# Altium PCB PCB_CPU_1.PcbDoc (part 1 of 2)
Units mm, origin at the board's own origin, x right, y up, seen from the top; angles counter-clockwise.
Board outline 195 x 54.5 mm, 2 copper layers (Top Layer, Bottom Layer); 53 components, 42 nets, 196 pads, 9 vias.
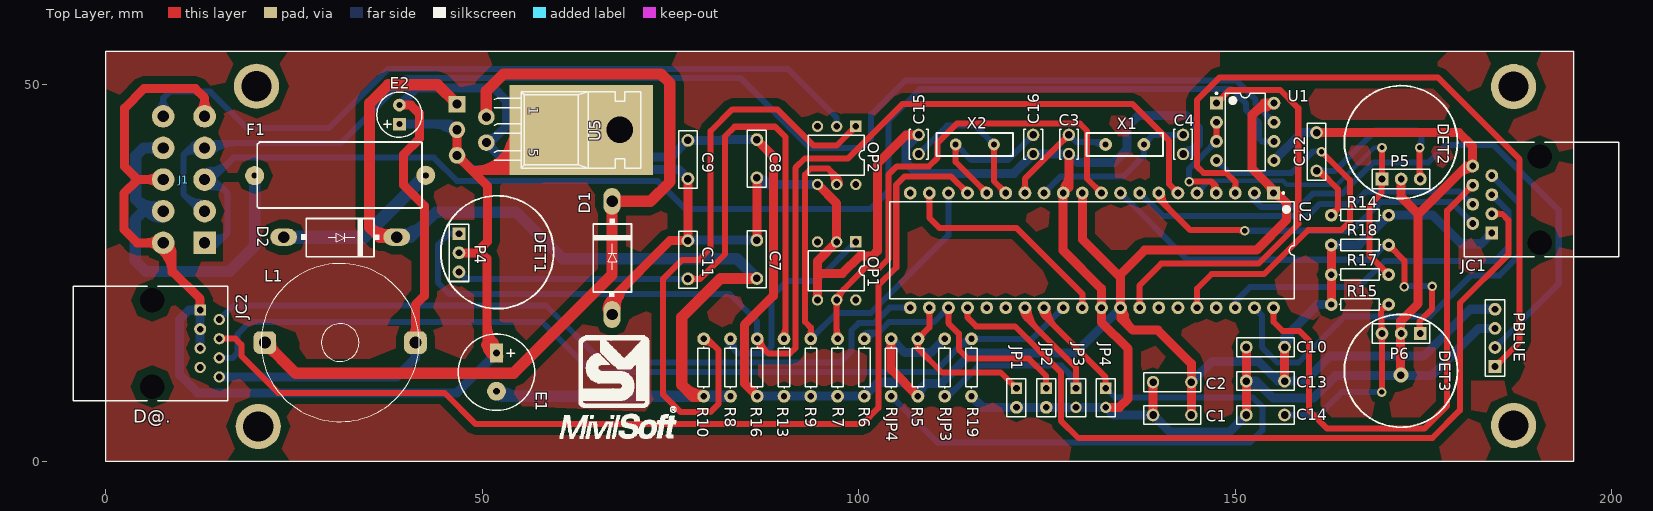
[diagram p0: Top Layer view]
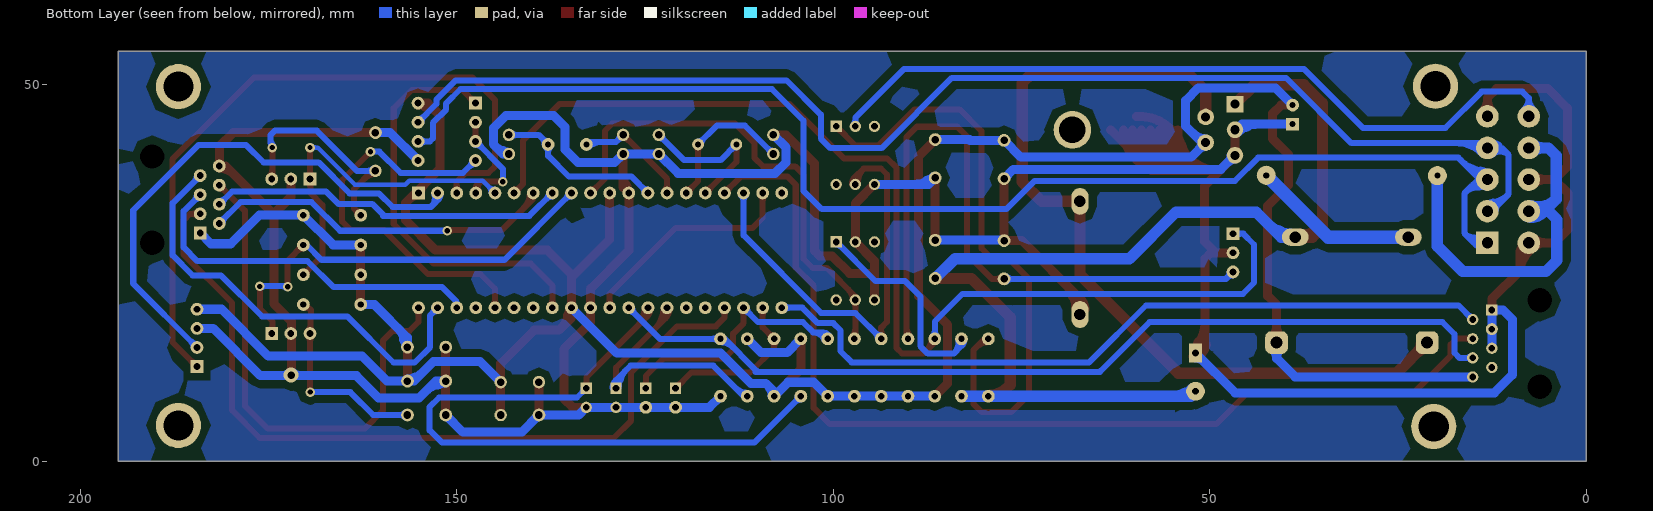
[diagram p1: Bottom Layer view, seen from below]

## Layer stack, top to bottom
Top Solder: solder mask 0.0102, Solder Resist, Dk 3.5
Top Layer: signal copper 0.0356
Dielectric 1: dielectric 0.32, FR-4, Dk 4.8
Bottom Layer: signal copper 0.0356
Bottom Solder: solder mask 0.0102, Solder Resist, Dk 3.5

## Board outline
0,0 0,54.5 195,54.5 195,0

## Design rules (kind name [scope] priority, off if disabled: settings)
Clearance "POLIGONO TOP BOTTON" [(InNamedPolygon('GND BOTTON'))] p1: gap=1
Clearance "POLIGONO TOP LAYER" [(InNamedPolygon('GND TOP'))] p2: gap=1
Clearance [All] p3: gap=0.254
PolygonConnect [All] p1: connectstyle=Relief reliefconductorwidth=0.254 reliefentries=4 polygonreliefangle="90 Angle" airgapwidth=0.254
RoomDefinition U_MDL_FUENTE_5V [InComponentClass('U_MDL_FUENTE_5V')] p1: confinementstyle=ConfineIn formatcopy=TRUE lockcomponents=FALSE outline 0.3,0 91,0 91,54.5 0.3,54.5
RoomDefinition U_MDL_RECEPTOR_IRF_2 [InComponentClass('U_MDL_RECEPTOR_IRF_2')] p2: confinementstyle=ConfineIn formatcopy=TRUE lockcomponents=FALSE outline 180,0.05 136.725,0.05 136.725,53.775 180,53.775
RoomDefinition U_MDL_RECEPTOR_IRF_1 [InComponentClass('U_MDL_RECEPTOR_IRF_1')] p3: confinementstyle=ConfineIn formatcopy=TRUE lockcomponents=FALSE outline 180,53.775 136,53.775 136,0.775 180,0.775
RoomDefinition U_MDL_RECEPTOR_IRF [InComponentClass('U_MDL_RECEPTOR_IRF')] p4: confinementstyle=ConfineIn formatcopy=TRUE lockcomponents=FALSE outline 92.225,53.775 30,53.775 30,0 92.225,0
RoomDefinition U_MDL_CONTROL [InComponentClass('U_MDL_CONTROL')] p5: confinementstyle=ConfineIn formatcopy=TRUE lockcomponents=FALSE outline 74,54.5 195,54.5 195,-0.025 74,-0.025
RoomDefinition U_MDL-485 [InComponentClass('U_MDL-485')] p6: confinementstyle=ConfineIn formatcopy=TRUE lockcomponents=FALSE outline 145,34.775 165,34.775 165,50.775 145,50.775
RoutingLayers RoutingLayers_1 [All] p1: top layer_v5=TRUE bottom layer_v5=TRUE
RoutingLayers [InNetClass('PRB[0..5]')] p2: top layer_v5=FALSE bottom layer_v5=TRUE
RoutingVias [All] p1: holewidth=0.711 width=1.27 viastyle="Through Hole" minholewidth=0.711 minwidth=1.27 maxholewidth=0.711 maxwidth=1.27
SolderMaskExpansion [All] p1: expansion=0.102
Width "Schematic Width Constraint_5" [InNet('VCC_IN')] p1: maxlimit=2 minlimit=1.2 preferedwidth=1.5
Width "Schematic Width Constraint_4" [InNet('NetD2_1')] p2: maxlimit=2 minlimit=1.2 preferedwidth=1.8
Width "Schematic Width Constraint_3" [InNet('24VCC')] p3: maxlimit=2 minlimit=1.2 preferedwidth=1.5
Width "Schematic Width Constraint_2" [InNet('NetD1_2')] p4: maxlimit=1.5 minlimit=0.8 preferedwidth=1.5
Width "Schematic Width Constraint_1" [InNet('5VCC')] p5: maxlimit=1.5 minlimit=0.8 preferedwidth=1.2
Width "Schematic Width Constraint" [InNet('GND')] p6: maxlimit=1.5 minlimit=0.8 preferedwidth=1.2
Width ALL [All] p7: maxlimit=2 minlimit=0.5 preferedwidth=0.8
28 further rules are at their usual default settings.

## Classes and differential pairs
component class U_MDL_RECEPTOR_IRF: C9 C11 P4 R13 R16
component class U_MDL_FUENTE_5V: C7 C8 D1 D2 E1 E2 F1 J1 L1 U5
component class U_MDL_CONTROL: C2 C3 C4 C15 C16 JC1 JC2 JP1 JP2 JP3 JP4 OP1 OP2 PBLUE R5 R6 R7 R8 R9 R10 R19 RJP3 RJP4 U2 X1 X2
component class U_MDL-485: C1 U1
component class U_MDL_RECEPTOR_IRF_1: C10 C12 P5 R14 R17
component class U_MDL_RECEPTOR_IRF_2: C13 C14 P6 R15 R18

## Components (designator, comment, footprint, x,y, rotation, side; value= is the part's Value field where it differs from the comment)
C1 "VP44BY224JB" VP44-2.5#1 141.647,6.15 r180 top
C2 "VP44BY224JB" VP44-2.5#2 141.647,10.519 r180 top
C3 "VP31BA220JB" VP31-2.5 127.935,42.091 r270 top
C4 "VP31BA220JB" VP31-2.5 143.099,42.091 r90 top
C7 "VP44BY224JB" VP44-2.5#3 86.481,26.831 r90 top
C8 "VP44BY224JB" VP44-2.5#3 86.481,40.192 r90 top
C9 "VP44BY224JB" VP44-2.5#3 77.328,40.09 r90 top
C10 "VP44BY224JB" VP44-2.5#3 154.033,15.167 r0 top
C11 "VP44BY224JB" VP44-2.5#3 77.328,26.775 r90 top
C12 "VP44BY224JB" VP44-2.5#1 160.828,41.126 r90 top
C13 "VP44BY224JB" VP44-2.5#3 154.033,10.659 r0 top
C14 "VP44BY224JB" VP44-2.5#3 154.033,6.15 r180 top
C15 "VP31BA220JB" VP31-2.5 107.971,42.091 r90 top
C16 "VP31BA220JB" VP31-2.5 123.185,42.091 r90 top
D1 "Diodo" 1N4000 67.25,34.525 r270 top
D2 "Diodo" 1N4000 38.65,29.775 r180 top
E1 "Cap Pol1" C1000UF 51.9,14.375 r270 top
E2 "Cap2" C1UF 39,44.775 r90 top
F1 "Fuse 1" FUSIBLE_BUSMATIC -1223.915,-1224.234 r180 top
J1 "Header 5X2" FP_CON10 10.375,37.425 r90 top
JC1 "RJ45" 15-43-6233#1 201,34.775 r90 top
JC2 "RJ45" 15-43-6233#2 -4.35,15.649 r270 top
JP1 "Header 2" HDR1X2#1 120.964,9.71 r270 top
JP2 "Header 2" HDR1X2#1 124.918,9.71 r270 top
JP3 "Header 2" HDR1X2#2 128.872,9.71 r270 top
JP4 "Header 2" HDR1X2#2 132.826,9.71 r270 top
L1 "Inductor Adj" Inductor_redondo 31.138,15.775 r0 top
OP1 "4N33" 4n35_4n33_6pines 97,25.429 r180 top
OP2 "4N33" 4n35_4n33_6pines 97,40.775 r180 top
P4 "Header 3" HDR1X3 46.92,30.235 r270 top
P5 "Header 3" HDR1X3 169.525,37.5 r0 top
P6 "Header 3" HDR1X3 174.605,16.975 r180 top
PBLUE "Header 4" HDR1X4 184.526,12.577 r90 top
R5 "Res" AXIAL-0.3#1 107.877,12.46 r270 top
R6 "Res" AXIAL-0.3#1 100.763,12.46 r270 top
R7 "Res" AXIAL-0.3#2 97.205,12.46 r270 top
R8 "Res" AXIAL-0.3#2 82.977,12.46 r90 top
R9 "Res" AXIAL-0.3#2 93.648,12.46 r270 top
R10 "Res" AXIAL-0.3#2 79.42,12.46 r90 top
R13 "Res" AXIAL-0.3#1 90.091,12.46 r90 top
R14 "Res" AXIAL-0.3#1 166.594,32.693 r180 top
R15 "Res" AXIAL-0.3#1 166.594,20.832 r0 top
R16 "Res" AXIAL-0.3#1 86.534,12.46 r270 top
R17 "Res" AXIAL-0.3#1 166.594,24.786 r180 top
R18 "Res" AXIAL-0.3#1 166.594,28.74 r180 top
R19 "Res" AXIAL-0.3#1 114.991,12.46 r270 top
RJP3 "Res" AXIAL-0.3#2 111.434,12.46 r90 top
RJP4 "Res" AXIAL-0.3#2 104.32,12.46 r90 top
U1 "DS3695N" N08E 151.354,43.768 r0 top
U2 "PIC18F4620-I/P" PDIP600-P40 130.983,28.02 r270 top
U5 "LM2596T-5.0" FP_LM2596_D_PCB 68.25,44.025 r270 top
X1 "20Mhz" XTAL-1#1 132.812,42.091 r0 top
X2 "20Mhz" XTAL-1#2 117.978,42.091 r180 top

## Footprints (in the part's own frame and the unit in brackets; to place one, negate y for a bottom-side part, rotate by r counter-clockwise, add the part's x,y. Pads: shape width x height; smd on the part's side, far side on the other; paste and mask are expansions set on the pad)
1N4000 [mil] "Diodo Rectificador de proposito general"
  oval 140x90 hole 60: 1(591.54,0) 2(0,0)
  silkscreen extent 90,-98 500,102, body extent -27,-102 615,106, height 183
4n35_4n33_6pines [mm] "optoacoplador"
  rect 1.5x1.5 hole 0.9: 1(-2.628,-3.717)
  round 1.5 hole 0.9: 2(-0.088,-3.717) 3(2.452,-3.717) 6(-2.628,3.988) 7(-0.088,3.988) 8(2.452,3.988)
  silkscreen extent -3.72,-2.55 3.7,2.75
15-43-6233#1 [mm] "Connector; PCB Jack, Thru-Hole; 1-Port; Unshielded without Lightpipes; Right Angle"
  rect 1.7x1.7 hole 0.9 paste+0: 1(-4.445,16.89)
  round 1.7 hole 0.9 paste+0: 2(-3.175,19.43) 3(-1.905,16.89) 4(-0.635,19.43) 5(0.635,16.89) 6(1.905,19.43) 7(3.175,16.89) 8(4.445,19.43)
  round 2.95 hole 3.25 unplated: MH1(-5.715,10.54) MH2(5.715,10.54)
  silkscreen extent -7.62,0 7.62,20.58
15-43-6233#2 [mm] "Connector; PCB Jack, Thru-Hole; 1-Port; Unshielded without Lightpipes; Right Angle"
  rect 1.5x1.5 hole 0.9: 1(-4.445,16.89)
  round 1.5 hole 0.9: 2(-3.175,19.43) 4(-0.635,19.43) 5(0.635,16.89) 6(1.905,19.43) 7(3.175,16.89) 8(4.445,19.43)
  round 1.6 hole 0.9: 3(-1.905,16.89)
  round 2.95 hole 3.25 unplated: MH1(-5.715,10.54) MH2(5.715,10.54)
  silkscreen extent -7.62,0 7.62,20.58
AXIAL-0.3#1 [mm] "Axial Device, Thru-Hole; 2 Leads; 0.3 in Pin Spacing"
  round 1.7 hole 0.85 paste+0: 1(-3.81,0) 2(3.81,0)
  silkscreen extent -2.77,-0.76 2.77,0.76
AXIAL-0.3#2 [mm] "Axial Device, Thru-Hole; 2 Leads; 0.3 in Pin Spacing"
  round 1.7 hole 0.85: 1(-3.81,0) 2(3.81,0)
  silkscreen extent -2.77,-0.76 2.77,0.76
C1UF [mm]
  rect 1.7x1.7 hole 0.8 paste+0: 1(0,0)
  round 1.7 hole 0.8 paste+0: 2(2.54,0)
  silkscreen extent -1.73,-3 4.27,3
C1000UF [mm]
  rect 2.5x1.7 hole 0.9: 1(0,0)
  round 2.5 hole 0.9 paste+0: 2(5.08,0)
  silkscreen extent -2.54,-5.08 7.62,5.08
FP_CON10 [mm]
  rect 3x3 hole 1.5: 1(-8.4,-2.75)
  round 3 hole 1.5: 2(-8.4,2.75) 3(-4.2,-2.75) 4(-4.2,2.75) 5(0,-2.75) 6(0,2.75) 7(4.2,-2.75) 8(4.2,2.75) 9(8.4,-2.75) 10(8.4,2.75)
FP_LM2596_D_PCB [mm] "Fotprint LM2596 disipa calor en el PCB"
  round 5 hole 3.5: 0(0,0)
  rect 12x19 smd: 0(0.008,-5.089)
  rect 2.2x2.2 hole 1.2: 1(-3.416,-21.597)
  round 2.2 hole 1.2: 2(-1.716,-17.697) 3(-0.016,-21.597) 4(1.684,-17.697) 5(3.384,-21.597)
  silkscreen extent -5.08,-16.62 5.08,2.79
FUSIBLE_BUSMATIC [mil]
  round 100 hole 31.5: 1(-49859,-49694) 2(-48964,-49692)
  silkscreen extent -49840,-49868 -48978,-49523
HDR1X2#1 [mm] "Connector; Header; 2 Position"
  rect 1.5x1.5 hole 0.9: 1(0,0)
  round 1.7 hole 0.9 paste+0: 2(2.54,0)
  silkscreen extent -1.27,-1.27 3.81,1.27
HDR1X2#2 [mm] "Connector; Header; 2 Position"
  rect 1.5x1.5 hole 0.9: 1(0,0)
  round 1.5 hole 0.9: 2(2.54,0)
  silkscreen extent -1.27,-1.27 3.81,1.27
HDR1X3 [mm] "Connector; Header; 3 Position"
  rect 1.7x1.7 hole 0.9 paste+0: 1(0,0)
  round 1.7 hole 0.9 paste+0: 2(2.54,0) 3(5.08,0)
  silkscreen extent -1.27,-1.27 6.35,1.27
HDR1X4 [mm] "Connector; Header; 4 Position"
  rect 1.7x1.7 hole 0.9 paste+0: 1(0,0)
  round 1.7 hole 0.9 paste+0: 2(2.54,0) 3(5.08,0) 4(7.62,0)
  silkscreen extent -1.27,-1.27 8.89,1.27
Inductor_redondo [mm]
  rrect50% 3x3 hole 1.6: 1(10,0) 2(-10,0)
  silkscreen extent -10.5,-10.5 10.5,10.5
N08E [mm] "DIP, 8-Leads, Row Spacing 7.62mm, Pitch 2.54mm, Body 9.91x6.35mm"
  rect 1.7x1.7 hole 0.9 paste+0: 1(-3.81,3.81)
  round 1.7 hole 0.9 paste+0: 2(-3.81,1.27) 3(-3.81,-1.27) 4(-3.81,-3.81) 5(3.81,-3.81) 6(3.81,-1.27) 7(3.81,1.27) 8(3.81,3.81)
  silkscreen extent -3.93,-5.15 2.65,5.23, body extent -3.6,-5.15 3.6,5.15, height 5.34
PDIP600-P40 [mm] "DIP, 40-Leads, Row Spacing 15.24mm, Pitch 2.54mm, Body 51.8x13.5mm"
  rect 1.7x1.7 hole 0.9 paste+0: 1(-7.62,24.13)
  round 1.7 hole 0.9 paste+0: 2(-7.62,21.59) 3(-7.62,19.05) 4(-7.62,16.51) 5(-7.62,13.97) 6(-7.62,11.43) 7(-7.62,8.89) 8(-7.62,6.35) 9(-7.62,3.81) 10(-7.62,1.27) 11(-7.62,-1.27) 12(-7.62,-3.81) 13(-7.62,-6.35) 14(-7.62,-8.89) 15(-7.62,-11.43) 16(-7.62,-13.97) 17(-7.62,-16.51) 18(-7.62,-19.05) 19(-7.62,-21.59) 20(-7.62,-24.13) 21(7.62,-24.13) 22(7.62,-21.59) 23(7.62,-19.05) 24(7.62,-16.51) 25(7.62,-13.97) 26(7.62,-11.43) 27(7.62,-8.89) 28(7.62,-6.35) 29(7.62,-3.81) 30(7.62,-1.27) 31(7.62,1.27) 32(7.62,3.81) 33(7.62,6.35) 34(7.62,8.89) 35(7.62,11.43) 36(7.62,13.97) 37(7.62,16.51) 38(7.62,19.05) 39(7.62,21.59) 40(7.62,24.13)
  silkscreen extent -7.74,-26.85 6.45,26.85, body extent -7.3,-26.85 7.3,26.85, height 6.35
VP31-2.5 [mm] "Capacitor, Ceramic, Thru-Hole, Dipped Radial; Body 4 x 2.5 mm (WxT) Pin Spacing 2.54 mm (typ)"
  round 1.65 hole 1: 1(-1.27,0) 2(1.27,0)
  silkscreen extent -2,-1.25 2,1.25
VP44-2.5#1 [mm] "Capacitor, Ceramic, Thru-Hole, Dipped Radial; Body 7.6 x 2.5 mm (WxT) Pin Spacing 5.08 mm (typ)"
  round 1.65 hole 1: 1(-2.54,0)
  round 1.7 hole 1 paste+0: 2(2.54,0)
  silkscreen extent -3.8,-1.25 3.8,1.25
VP44-2.5#2 [mm] "Capacitor, Ceramic, Thru-Hole, Dipped Radial; Body 7.6 x 2.5 mm (WxT) Pin Spacing 5.08 mm (typ)"
  round 1.65 hole 1: 1(-2.54,0) 2(2.54,0)
  silkscreen extent -3.8,-1.25 3.8,1.25
VP44-2.5#3 [mm] "Capacitor, Ceramic, Thru-Hole, Dipped Radial; Body 7.6 x 2.5 mm (WxT) Pin Spacing 5.08 mm (typ)"
  round 1.7 hole 1 paste+0: 1(-2.54,0) 2(2.54,0)
  silkscreen extent -3.8,-1.25 3.8,1.25
XTAL-1#1 [mm]
  round 1.7 hole 0.8 paste+0: 1(0,0) 2(5.08,0)
  silkscreen extent -2.54,-1.52 7.62,1.52
XTAL-1#2 [mm]
  round 1.575 hole 0.8: 1(0,0) 2(5.08,0)
  silkscreen extent -2.54,-1.52 7.62,1.52

## Part data
C1 C2 C7 C8 C9 C10 C11 C12 C13 C14: "Dipped Radial Multilayer Ceramic Capacitor X7R: 220nF, 100V"
C3 C4 C15 C16: "Dipped Radial Multilayer Ceramic Capacitor COG (NPO): 22pF, 100V"
D1 D2: "Diodo rectificador"
E1: "Polarized Capacitor (Radial)"
E2: "Capacitor"
F1: "Fuse"
J1: "Header, 5-Pin, Dual row"
JC1 JC2: library part 15-43-6233, "Right Angle, Standard Profile, RJ45-Keyed, Flange Mount PCB Jack"
JP1 JP2 JP3 JP4: "Header, 2-Pin"
L1: "Adjustable Inductor"
OP1 OP2: library part ILD74, "Optocoupler, Phototransistor Output, Dual Channel, TTL Compatible, Pb-free"
P4 P5 P6: "Header, 3-Pin"
PBLUE: "Header, 4-Pin"
R5 R6 R7 R8 R9 R10 R13 R14 R15 R16 R17 R18 R19 RJP3 RJP4: library part Res1, "Resistor"
U1: "Multipoint RS485/RS422 Transceiver/Repeater"
U2: "Enhanced Flash Microcontroller with 10-Bit A/D and nanoWatt Technology, 64K Flash, 40-Pin PDIP, Industrial Temperature Range"
U5: "SIMPLE SWITCHER Power Converter 150 KHz 3A Step-Down Voltage Regulator"
X1 X2: library part "Cristal de cuarzo", "Cristal de cuarzo"

## Free pads (board coordinates)
  round 6 hole 4: 0(20.032,49.821) 0(20.26,4.626) 0(187,4.775) 0(187,49.775)

## Via types
v1: diameter 1.27, hole 0.711, Top Layer to Bottom Layer, 8 vias
v2: diameter 2, hole 1, Top Layer to Bottom Layer, 1 vias

## Nets (pads, with @x,y where several pads share a name; then routed paths per layer and width w, separated by ;. In a path a pad name is that pad's centre, name@x,y a point inside that pad or via, vN(x,y) a via of type N, cw(c..) or ccw(c..) an arc to the next point about the centre after c; other vN are vias at no path point)
5VCC: C1.1 C2.1 C8.2 C9.2 C10.2 C13.2 E2.2 JC1.1 JC2.8 L1.1 PBLUE.4 R5.2 R6.2 R7.2 R9.2 R13.1 R14.1 R15.1 R16.2 R17.2 R18.2 RJP3.2 RJP4.2 U1.8 U2.1 U2.11 U2.32 U5.4 | length 507.7
  Top Layer w1.2: E2.2@39,47.315 40.535,47.315 41.675,46.175 41.675,42.869 39.575,40.769 39.575,36.68 42.325,33.93 42.325,21.979 41.138,20.792 L1.1@41.138,15.775 ; C8.2@86.481,42.732 88.675,40.538 88.675,21.974 84.826,18.125 84.826,10.358 R16.2@86.534,8.65 ; RJP4.2@104.32,16.27 104.32,12.207 R5.2@107.877,8.65 ; U2.11@129.713,35.64 129.713,29.487 134.793,24.407 U2.32@134.793,20.4 ; U2.32@134.787,20.4 U2.32@134.793,20.4 ; U2.32@134.85,19.775 134.85,19 136.425,17.425 139.75,17.425 144.187,12.988 C2.1@144.187,10.519 C1.1@144.187,6.15 ; U1.8@155.164,47.578 153.853,47.578 152.25,45.975 152.25,38.9 156.86,34.29 156.86,32.06 152.85,28.05 138,28.05 134.793,24.843 U2.32@134.793,20.4 ; C13.2@156.573,10.659 C10.2@156.573,15.167 ; R15.1@162.784,20.832 R17.2@162.784,24.786 R18.2@162.784,28.739 ; L1.1@40.501,16.411 ccw(c38.965,17.948) 41.138,17.948 ; L1.1@40.501,16.411 ccw(c38.965,17.948) 41.138,17.948 ; L1.1@40.501,16.411 ccw(c38.965,17.948) 41.138,17.948 ; 41.138,17.948 ccw(c43.31,17.948) L1.1@41.774,16.411 ; 41.138,17.948 ccw(c43.31,17.948) L1.1@41.774,16.411 ; 41.138,17.948 ccw(c43.31,17.948) L1.1@41.774,16.411 ; U2.32@134.668,20.183 cw(c133.954,18.947) 135.334,19.316 ; U2.32@134.668,20.183 cw(c133.954,18.947) 135.334,19.316 ; U2.32@134.668,20.183 cw(c133.954,18.947) 135.334,19.316 ; U2.32@135.043,20.4 ccw(c138.889,20.4) 136.17,17.68 ; U2.32@135.043,20.4 ccw(c138.889,20.4) 136.17,17.68 ; U2.32@135.043,20.4 ccw(c138.889,20.4) 136.17,17.68 ; 152.499,46.224 cw(c155.164,43.559) U1.8@155.164,47.328 ; 152.499,46.224 cw(c155.164,43.559) U1.8@155.164,47.328 ; 152.499,46.224 cw(c155.164,43.559) U1.8@155.164,47.328 ; 154.08,47.037 ccw(c153.711,48.417) U1.8@154.947,47.703 ; 154.08,47.037 ccw(c153.711,48.417) U1.8@154.947,47.703 ; 154.08,47.037 ccw(c153.711,48.417) U1.8@154.947,47.703 ; 154.406,36.744 cw(c153.301,35.64) U2.1@154.863,35.64 ; 154.406,36.744 cw(c153.301,35.64) U2.1@154.863,35.64 ; 154.406,36.744 cw(c153.301,35.64) U2.1@154.863,35.64 ; U2.1@155.113,35.39 cw(c155.113,33.828) 156.218,34.932 ; U2.1@155.113,35.39 cw(c155.113,33.828) 156.218,34.932 ; U2.1@155.113,35.39 cw(c155.113,33.828) 156.218,34.932
  Bottom Layer w1.2: JC2.8@15.08,11.204 38.679,11.204 41.138,13.663 ; E2.2@39,47.315 41.285,49.6 51.52,49.6 53.2,47.92 53.2,44.525 51.016,42.341 U5.4@50.553,42.341 52.494,40.4 75.097,40.4 C9.2@77.328,42.63 81.828,42.63 81.93,42.732 C8.2@86.481,42.732 ; L1.1@41.138,15.775 41.138,13.663 ; R16.2@86.534,8.65 R13.1@90.091,8.65 R9.2@93.648,8.65 R7.2@97.205,8.65 R6.2@100.763,8.65 102.613,10.5 106.027,10.5 R5.2@107.877,8.65 107.877,9.227 109.004,10.354 110.954,10.354 114.975,14.375 128.768,14.375 U2.32@134.793,20.4 ; RJP4.2@104.32,16.27 106.147,14.442 109.606,14.442 RJP3.2@111.434,16.27 ; C2.1@144.187,10.519 146.918,13.25 153.125,13.25 155.716,10.659 C13.2@156.573,10.659 159.284,10.659 162.6,13.975 175.05,13.975 181.272,20.197 PBLUE.4@184.526,20.197 ; C10.2@156.573,15.167 156.573,16.423 160.982,20.832 R15.1@162.784,20.832 ; R18.2@162.784,28.739 166.45,28.739 R14.1@170.404,32.693 176.257,32.693 180.05,28.9 182.68,28.9 JC1.1@184.11,30.33 ; L1.1@40.514,15.126 cw(c39.109,13.663) 41.138,13.663 ; L1.1@40.514,15.126 cw(c39.109,13.663) 41.138,13.663 ; L1.1@40.514,15.126 cw(c39.109,13.663) 41.138,13.663 ; 41.138,13.663 cw(c43.166,13.663) L1.1@41.761,15.126 ; 41.138,13.663 cw(c43.166,13.663) L1.1@41.761,15.126 ; 41.138,13.663 cw(c43.166,13.663) L1.1@41.761,15.126 ; U5.4@50.553,41.841 cw(c50.553,40.634) 51.407,41.487 ; U5.4@50.553,41.841 cw(c50.553,40.634) 51.407,41.487 ; U5.4@50.553,41.841 cw(c50.553,40.634) 51.407,41.487 ; U5.4@50.553,42.841 ccw(c50.553,45.166) 52.197,43.522 ; U5.4@50.553,42.841 ccw(c50.553,45.166) 52.197,43.522 ; U5.4@50.553,42.841 ccw(c50.553,45.166) 52.197,43.522 ; U5.4@51.053,42.341 ccw(c52.26,42.341) 51.407,41.487 ; U5.4@51.053,42.341 ccw(c52.26,42.341) 51.407,41.487 ; U5.4@51.053,42.341 ccw(c52.26,42.341) 51.407,41.487 ; R5.2@107.752,8.866 ccw(c107.038,10.103) 108.417,9.734 ; R5.2@107.752,8.866 ccw(c107.038,10.103) 108.417,9.734 ; R5.2@107.752,8.866 ccw(c107.038,10.103) 108.417,9.734 ; R5.2@108.127,8.65 cw(c110.123,8.65) 108.711,10.061 ; R5.2@108.127,8.65 cw(c110.123,8.65) 108.711,10.061 ; R5.2@108.127,8.65 cw(c110.123,8.65) 108.711,10.061 ; 154.683,11.692 ccw(c156.573,13.582) C13.2@156.573,10.909 ; 154.683,11.692 ccw(c156.573,13.582) C13.2@156.573,10.909 ; 154.683,11.692 ccw(c156.573,13.582) C13.2@156.573,10.909 ; 155.49,11.199 cw(c155.12,9.82) C13.2@156.357,10.534 ; 155.49,11.199 cw(c155.12,9.82) C13.2@156.357,10.534 ; 155.49,11.199 cw(c155.12,9.82) C13.2@156.357,10.534 ; C10.2@156.448,15.384 ccw(c155.734,16.621) 157.114,16.251 ; C10.2@156.448,15.384 ccw(c155.734,16.621) 157.114,16.251 ; C10.2@156.448,15.384 ccw(c155.734,16.621) 157.114,16.251 ; C10.2@156.823,15.167 cw(c160.459,15.167) 157.888,17.738 ; C10.2@156.823,15.167 cw(c160.459,15.167) 157.888,17.738 ; C10.2@156.823,15.167 cw(c160.459,15.167) 157.888,17.738
24VCC: C7.1 D2.2 E1.2 R8.1 R10.1 U5.1 | length 194.6
  Top Layer w1.5: D2.2@38.65,29.775 36.35,29.775 35.025,31.1 35.025,47.55 37.477,50.002 44.092,50.002 U5.1@46.653,47.441 ; R10.1@79.42,8.65 78.025,8.65 76.525,10.15 76.525,19.15 81.666,24.291 C7.1@86.481,24.291 ; 35.025,31.1 ccw(c37.398,33.473) D2.2@37.95,30.163 ; 35.025,31.1 ccw(c37.398,33.473) D2.2@37.95,30.163 ; 35.025,31.1 ccw(c37.398,33.473) D2.2@37.95,30.163 ; 36.195,30.333 cw(c35.979,28.098) D2.2@37.712,29.525 ; 36.195,30.333 cw(c35.979,28.098) D2.2@37.712,29.525 ; 36.195,30.333 cw(c35.979,28.098) D2.2@37.712,29.525 ; 76.868,9.807 ccw(c79.42,12.359) R10.1@79.42,8.75 ; 76.868,9.807 ccw(c79.42,12.359) R10.1@79.42,8.75 ; 76.868,9.807 ccw(c79.42,12.359) R10.1@79.42,8.75
  Bottom Layer w1.5: D2.2@38.65,29.775 40.525,29.775 43.85,33.1 54.5,33.1 60.687,26.913 83.859,26.913 C7.1@86.481,24.291 ; D2.2@39.406,30.149 ccw(c39.721,31.126) 40.447,30.4 ; E1.2@51.9,9.295 52.545,8.65 R10.1@79.42,8.65 R8.1@82.977,8.65 ; D2.2@39.285,30.168 ccw(c39.285,34.11) 42.073,31.323 ; D2.2@39.285,30.168 ccw(c39.285,34.11) 42.073,31.323 ; D2.2@39.285,30.168 ccw(c39.285,34.11) 42.073,31.323 ; D2.2@39.625,29.579 cw(c41.569,28.456) 40.988,30.624 ; D2.2@39.625,29.579 cw(c41.569,28.456) 40.988,30.624 ; D2.2@39.625,29.579 cw(c41.569,28.456) 40.988,30.624 ; E1.2@52.17,8.874 cw(c52.881,7.763) 53.541,8.906 ; E1.2@52.17,8.874 cw(c52.881,7.763) 53.541,8.906 ; E1.2@52.17,8.874 cw(c52.881,7.763) 53.541,8.906 ; E1.2@52.254,9.649 ccw(c54.665,12.06) 54.665,8.65 ; E1.2@52.254,9.649 ccw(c54.665,12.06) 54.665,8.65 ; E1.2@52.254,9.649 ccw(c54.665,12.06) 54.665,8.65
485_DO_A: J1.1 J1.5 U1.6 | length 230.2
  Bottom Layer w0.8: J1.5@12.675,37.642 cw(c14.584,36.721) 14.035,38.769 ; J1.5@12.769,37.074 ccw(c14.493,38.773) 14.475,36.353 ; J1.1@13.125,29.025 14.925,29.025 ; J1.5@13.395,37.295 cw(c16.659,35.72) 15.721,39.221 ; J1.5@13.675,38.378 ccw(c14.508,39.821) 14.939,38.211 ; U1.6@155.164,42.498 153.577,42.498 153.2,42.875 153.2,44.95 151.43,46.72 151.43,47.545 149.525,49.45 108.166,49.45 103.984,45.267 103.984,35.937 101.539,33.492 77.028,33.492 73.27,37.25 46.65,37.25 43.575,40.325 17,40.325 14.1,37.425 J1.5@13.125,37.425 14.375,37.425 16.2,35.6 ; 14.925,29.025 cw(c14.925,29.948) 14.104,29.527 ccw(c14.925,29.948) 14.925,29.025 ; 14.925,29.025 ccw(c14.925,28.102) 14.104,28.523 cw(c14.925,28.102) 14.925,29.025 ; 14.925,29.025 16.2,30.3 ; 16.2,30.3 cw(c14.729,31.771) 13.68,29.975 ccw(c14.729,31.771) 16.2,30.3 ; 16.2,30.3 16.2,35.6 ; 16.2,35.6 ccw(c14.137,33.537) 13.402,36.36 cw(c14.137,33.537) 16.2,35.6 ; 154.078,42.498 cw(c154.078,41.411) U1.6@154.846,42.18 ; 154.078,42.498 ccw(c154.078,43.584) U1.6@154.846,42.816 ; 154.078,42.498 cw(c154.078,41.411) U1.6@154.846,42.18 ; 154.078,42.498 ccw(c154.078,43.584) U1.6@154.846,42.816 ; 154.078,42.498 cw(c154.078,41.411) U1.6@154.846,42.18 ; 154.078,42.498 ccw(c154.078,43.584) U1.6@154.846,42.816 ; J1.1@12.873,28.593 ccw(c13.647,29.919) 14.733,28.833 cw(c13.647,29.919) J1.1@12.873,28.593 ; J1.5@13.125,37.725 ccw(c13.125,40.803) 15.302,38.627 cw(c13.125,40.803) J1.5@13.125,37.725 ; J1.5@13.125,38.525 ccw(c13.125,43.535) 16.667,39.992 cw(c13.125,43.535) J1.5@13.125,38.525 ; J1.5@13.201,37.135 cw(c13.729,35.105) 15.212,36.588 ccw(c13.729,35.105) J1.5@13.201,37.135 ; J1.1@13.276,29.284 ccw(c14.188,30.845) 15.467,29.567 cw(c14.188,30.845) J1.1@13.276,29.284
485_DO_B: J1.3 J1.7 U1.7 | length 219.3
  Bottom Layer w0.5: U1.7@155.164,45.038 U1.7@155.164,45.211
  Bottom Layer w0.8: 10.852,34.934 cw(c10.092,32.099) J1.3@12.844,33.121 ; 12.348,34.533 cw(c11.873,32.76) J1.3@13.594,33.399 ; J1.3@13.125,33.225 12.575,33.225 10.3,35.5 10.3,40.7 ; J1.7@13.125,41.625 11.225,41.625 ; J1.7@13.6,41.5 14.35,42.25 31.201,42.25 39.876,50.925 84.275,50.925 93.6,41.6 100.4,41.6 101.666,42.866 101.666,46.04 106.226,50.6 150.175,50.6 152.745,48.03 152.745,47.456 U1.7@155.164,45.038 ; 10.3,40.7 cw(c11.403,39.597) 12.413,40.786 ccw(c11.403,39.597) 10.3,40.7 ; 10.3,40.7 11.225,41.625 ; 11.225,41.625 cw(c11.225,40.534) 12.171,41.077 ccw(c11.225,40.534) 11.225,41.625 ; 11.225,41.625 ccw(c11.225,42.716) 12.171,42.173 cw(c11.225,42.716) 11.225,41.625 ; 154.396,45.806 cw(c153.628,45.038) 154.714,45.038 ccw(c153.628,45.038) 154.396,45.806 ; 154.396,45.806 ccw(c155.164,46.574) 155.164,45.488 cw(c155.164,46.574) 154.396,45.806 ; 10.308,35.492 ccw(c13.125,38.308) 13.125,34.325 cw(c13.125,38.308) 10.308,35.492 ; 10.914,41.314 cw(c11.967,40.261) 12.931,41.396 ccw(c11.967,40.261) 10.914,41.314 ; 11.528,41.928 cw(c12.531,40.925) 13.449,42.006 ccw(c12.531,40.925) 11.528,41.928 ; 11.636,34.164 cw(c10.697,33.225) 12.025,33.225 ccw(c10.697,33.225) 11.636,34.164 ; 11.674,34.126 ccw(c13.125,35.577) 13.125,33.525 cw(c13.125,35.577) 11.674,34.126 ; J1.7@13.337,41.413 cw(c15.358,39.392) 15.358,42.25 ccw(c15.358,39.392) J1.7@13.337,41.413 ; J1.7@13.903,40.847 cw(c17.29,37.46) 17.29,42.25 ccw(c17.29,37.46) J1.7@13.903,40.847
ACTIVACION_COM: U2.19 U2.30 | length 39.9
  Top Layer w0.8: U2.19@109.393,35.64 109.393,32.332 110.725,31 120.95,31 129.713,22.237 U2.30@129.713,20.4 ; U2.19@109.075,35.322 cw(c108.307,34.553) 109.393,34.553 ; U2.19@109.075,35.322 cw(c108.307,34.553) 109.393,34.553 ; U2.19@109.075,35.322 cw(c108.307,34.553) 109.393,34.553 ; 109.393,34.553 cw(c110.48,34.553) U2.19@109.711,35.322 ; 109.393,34.553 cw(c110.48,34.553) U2.19@109.711,35.322 ; 109.393,34.553 cw(c110.48,34.553) U2.19@109.711,35.322 ; U2.30@129.395,20.718 ccw(c128.627,21.486) 129.713,21.486 ; U2.30@129.395,20.718 ccw(c128.627,21.486) 129.713,21.486 ; U2.30@129.395,20.718 ccw(c128.627,21.486) 129.713,21.486 ; 129.713,21.486 ccw(c130.8,21.486) U2.30@130.031,20.718 ; 129.713,21.486 ccw(c130.8,21.486) U2.30@130.031,20.718 ; 129.713,21.486 ccw(c130.8,21.486) U2.30@130.031,20.718
BLUE_RX: PBLUE.2 U2.2 | length 87.4
  Bottom Layer w0.8: U2.2@152.573,35.64 152.775,35.438 152.775,34.45 153.425,33.8 ; PBLUE.2@184.526,15.117 193,23.59 193,33.35 184.35,42 177.992,42 175.692,39.7 168.375,39.7 164.275,35.6 160.365,35.6 158.565,33.8 153.425,33.8 ; U2.2@152.239,35.743 ccw(c153.197,35.446) 152.488,34.737 ; U2.2@152.239,35.743 ccw(c153.197,35.446) 152.488,34.737 ; U2.2@152.239,35.743 ccw(c153.197,35.446) 152.488,34.737 ; U2.2@152.326,35.263 cw(c151.782,34.433) 152.775,34.433 ; U2.2@152.326,35.263 cw(c151.782,34.433) 152.775,34.433 ; U2.2@152.326,35.263 cw(c151.782,34.433) 152.775,34.433 ; U2.2@153.003,35.507 ccw(c154.628,35.003) 153.425,33.8 ; U2.2@153.003,35.507 ccw(c154.628,35.003) 153.425,33.8 ; U2.2@153.003,35.507 ccw(c154.628,35.003) 153.425,33.8 ; PBLUE.2@184.526,15.567 ccw(c184.526,16.653) 185.295,15.885 ; PBLUE.2@184.526,15.567 ccw(c184.526,16.653) 185.295,15.885 ; PBLUE.2@184.526,15.567 ccw(c184.526,16.653) 185.295,15.885 ; PBLUE.2@184.976,15.117 cw(c186.063,15.117) 185.295,15.885 ; PBLUE.2@184.976,15.117 cw(c186.063,15.117) 185.295,15.885 ; PBLUE.2@184.976,15.117 cw(c186.063,15.117) 185.295,15.885
BLUE_TX: PBLUE.1 U2.3 | length 103.9
  Top Layer w0.8: U2.3@150.033,35.64 150.033,37.117 148.85,38.3 145.825,38.3 144.973,39.152 144.973,48.021 147.945,50.993 176.926,50.993 187.8,40.119 187.8,15.85 PBLUE.1@184.526,12.577 ; U2.3@149.715,35.958 ccw(c148.947,36.726) 150.033,36.726 ; U2.3@149.715,35.958 ccw(c148.947,36.726) 150.033,36.726 ; U2.3@149.715,35.958 ccw(c148.947,36.726) 150.033,36.726 ; 150.033,36.726 ccw(c151.12,36.726) U2.3@150.351,35.958 ; 150.033,36.726 ccw(c151.12,36.726) U2.3@150.351,35.958 ; 150.033,36.726 ccw(c151.12,36.726) U2.3@150.351,35.958 ; PBLUE.1@184.526,13.027 ccw(c184.526,14.113) PBLUE.1@185.295,13.345 ; PBLUE.1@184.526,13.027 ccw(c184.526,14.113) PBLUE.1@185.295,13.345 ; PBLUE.1@184.526,13.027 ccw(c184.526,14.113) PBLUE.1@185.295,13.345 ; PBLUE.1@184.976,12.577 cw(c186.063,12.577) PBLUE.1@185.295,13.345 ; PBLUE.1@184.976,12.577 cw(c186.063,12.577) PBLUE.1@185.295,13.345 ; PBLUE.1@184.976,12.577 cw(c186.063,12.577) PBLUE.1@185.295,13.345
BUZZER: JC2.2 U2.21 | length 108.1
  Bottom Layer w0.8: JC2.2@15.08,18.824 16.956,20.7 58.476,20.7 66.026,13.15 97.575,13.15 99.05,14.625 99.05,17.4 100,18.35 102.075,18.35 104.125,20.4 U2.21@106.853,20.4 ; 15.678,19.421 cw(c15.08,20.019) 15.08,19.174 ccw(c15.08,20.019) 15.678,19.421 ; 15.678,19.421 ccw(c16.275,18.824) 15.43,18.824 cw(c16.275,18.824) 15.678,19.421 ; 105.767,20.4 cw(c105.767,19.313) U2.21@106.535,20.082 ; 105.767,20.4 ccw(c105.767,21.486) U2.21@106.535,20.718 ; 105.767,20.4 cw(c105.767,19.313) U2.21@106.535,20.082 ; 105.767,20.4 ccw(c105.767,21.486) U2.21@106.535,20.718 ; 105.767,20.4 cw(c105.767,19.313) U2.21@106.535,20.082 ; 105.767,20.4 ccw(c105.767,21.486) U2.21@106.535,20.718
DET_1: P4.1 R16.1 U2.6 | length 168.9
  Top Layer w0.8: R16.1@86.534,16.27 86.534,15.791 88.01,14.315 90.89,14.315 91.607,15.032 91.607,38.982 92.875,40.25 98.619,40.25 105.806,47.437 136.388,47.437 141.239,42.585 141.239,36.814 U2.6@142.413,35.64 ; R16.1@86.984,16.27 ccw(c89.227,16.27) 87.641,14.684 ; R16.1@86.984,16.27 ccw(c89.227,16.27) 87.641,14.684 ; R16.1@86.984,16.27 ccw(c89.227,16.27) 87.641,14.684 ; 141.645,36.408 cw(c140.877,35.64) U2.6@141.963,35.64 ; 141.645,36.408 ccw(c142.413,37.176) U2.6@142.413,36.09 ; 141.645,36.408 cw(c140.877,35.64) U2.6@141.963,35.64 ; 141.645,36.408 ccw(c142.413,37.176) U2.6@142.413,36.09 ; 141.645,36.408 cw(c140.877,35.64) U2.6@141.963,35.64 ; 141.645,36.408 ccw(c142.413,37.176) U2.6@142.413,36.09
  Bottom Layer w0.8: P4.1@46.92,30.235 45.56,30.235 44.125,28.8 44.125,23.725 45.625,22.225 82.875,22.225 86.534,18.566 R16.1@86.534,16.27 ; 45.834,30.235 cw(c45.834,29.149) P4.1@46.602,29.917 ; 45.834,30.235 ccw(c45.834,31.321) P4.1@46.602,30.553 ; 45.834,30.235 cw(c45.834,29.149) P4.1@46.602,29.917 ; 45.834,30.235 ccw(c45.834,31.321) P4.1@46.602,30.553 ; 45.834,30.235 cw(c45.834,29.149) P4.1@46.602,29.917 ; 45.834,30.235 ccw(c45.834,31.321) P4.1@46.602,30.553 ; R16.1@86.216,16.588 ccw(c85.448,17.356) 86.534,17.356 ; R16.1@86.216,16.588 ccw(c85.448,17.356) 86.534,17.356 ; R16.1@86.216,16.588 ccw(c85.448,17.356) 86.534,17.356 ; 86.534,17.356 ccw(c87.621,17.356) R16.1@86.852,16.588 ; 86.534,17.356 ccw(c87.621,17.356) R16.1@86.852,16.588 ; 86.534,17.356 ccw(c87.621,17.356) R16.1@86.852,16.588
DET_2: P5.1 R17.1 U2.5 | length 66.7
  Top Layer w0.8: v1@169.35,41.675 169.525,41.5 P5.1@169.525,37.5 169.475,37.45 169.475,35.65 167.875,34.05 167.875,27.315 R17.1@170.404,24.786 ; 169.525,38.586 cw(c168.439,38.586) 169.207,37.818 ccw(c168.439,38.586) 169.525,38.586 ; 169.525,38.586 ccw(c170.611,38.586) 169.843,37.818 cw(c170.611,38.586) 169.525,38.586 ; 169.636,25.554 cw(c168.868,24.786) R17.1@169.954,24.786 ; 169.636,25.554 ccw(c170.404,26.322) R17.1@170.404,25.236 ; 169.636,25.554 cw(c168.868,24.786) R17.1@169.954,24.786 ; 169.636,25.554 ccw(c170.404,26.322) R17.1@170.404,25.236 ; 169.636,25.554 cw(c168.868,24.786) R17.1@169.954,24.786 ; 169.636,25.554 ccw(c170.404,26.322) R17.1@170.404,25.236 ; P5.1@169.207,37.182 cw(c168.559,36.534) 169.475,36.534 ccw(c168.559,36.534) P5.1@169.207,37.182 ; 169.475,36.293 cw(c170.732,36.293) 169.843,37.182 ccw(c170.732,36.293) 169.475,36.293
  Bottom Layer w0.6: U2.5@144.953,35.64 146.563,37.25 156.353,37.25 156.853,36.75 163.55,36.75 168.475,41.675 v1@169.35,41.675 ; U2.5@144.953,36.19 ccw(c144.953,37.518) 145.892,36.579 ; U2.5@144.953,36.19 ccw(c144.953,37.518) 145.892,36.579 ; U2.5@144.953,36.19 ccw(c144.953,37.518) 145.892,36.579 ; U2.5@145.503,35.64 cw(c146.831,35.64) 145.892,36.579 ; U2.5@145.503,35.64 cw(c146.831,35.64) 145.892,36.579 ; U2.5@145.503,35.64 cw(c146.831,35.64) 145.892,36.579 ; 168.716,41.675 cw(c168.716,40.866) 169.288,41.438 ccw(c168.716,40.866) 168.716,41.675 ; 168.716,41.675 ccw(c168.716,42.484) 169.288,41.912 cw(c168.716,42.484) 168.716,41.675
  other v1: 169.525,41.675
DET_3: P6.1 R18.1 U2.9 | length 72.7
  Top Layer w0.8: R18.1@170.404,28.739 172.5,26.644 v1(172.5,23.2) ; P6.1@174.475,16.975 174.475,18.575 176.175,20.275 v1(176.175,23.225) ; R18.1@170.404,28.289 cw(c170.404,27.203) 171.172,27.971 ; R18.1@170.404,28.289 cw(c170.404,27.203) 171.172,27.971 ; R18.1@170.404,28.289 cw(c170.404,27.203) 171.172,27.971 ; R18.1@170.854,28.739 ccw(c171.94,28.739) 171.172,27.971 ; R18.1@170.854,28.739 ccw(c171.94,28.739) 171.172,27.971 ; R18.1@170.854,28.739 ccw(c171.94,28.739) 171.172,27.971 ; 174.475,18.375 ccw(c176.005,18.375) 174.923,17.293 cw(c176.005,18.375) 174.475,18.375
  Bottom Layer w0.8: U2.9@134.793,35.64 143.658,26.775 168.025,26.775 169.989,28.739 R18.1@170.404,28.739 ; v1(172.5,23.2) 172.575,23.275 175.45,23.275 ; U2.9@134.793,35.19 cw(c134.793,34.103) 135.561,34.872 ; U2.9@134.793,35.19 cw(c134.793,34.103) 135.561,34.872 ; U2.9@134.793,35.19 cw(c134.793,34.103) 135.561,34.872 ; U2.9@135.243,35.64 ccw(c136.33,35.64) 135.561,34.872 ; U2.9@135.243,35.64 ccw(c136.33,35.64) 135.561,34.872 ; U2.9@135.243,35.64 ccw(c136.33,35.64) 135.561,34.872 ; 175.487,23.275 cw(c175.487,22.537) v1@176.009,23.059 ; 175.487,23.275 cw(c175.487,22.537) v1@176.009,23.059 ; 175.487,23.275 cw(c175.487,22.537) v1@176.009,23.059 ; 175.487,23.275 cw(c175.487,22.537) v1@176.009,23.059 ; v1@172.666,23.034 cw(c173.248,22.452) 173.248,23.275 ccw(c173.248,22.452) v1@172.666,23.034
DET_4: JC1.7 U2.39 | length 68.9
  Bottom Layer w0.8: U2.39@152.573,20.4 153.575,19.398 153.575,15.175 155.625,13.125 158.425,13.125 164.55,19.25 175.9,19.25 181.35,24.7 185.125,24.7 187.775,27.35 187.775,34.285 JC1.7@184.11,37.95 ; U2.39@152.573,19.95 cw(c152.573,18.863) 153.341,19.632 ; U2.39@152.573,19.95 cw(c152.573,18.863) 153.341,19.632 ; U2.39@152.573,19.95 cw(c152.573,18.863) 153.341,19.632 ; U2.39@153.023,20.4 ccw(c154.11,20.4) 153.341,19.632 ; U2.39@153.023,20.4 ccw(c154.11,20.4) 153.341,19.632 ; U2.39@153.023,20.4 ccw(c154.11,20.4) 153.341,19.632 ; JC1.7@184.11,37.5 cw(c184.11,36.414) 184.878,37.182 ; JC1.7@184.11,37.5 cw(c184.11,36.414) 184.878,37.182 ; JC1.7@184.11,37.5 cw(c184.11,36.414) 184.878,37.182 ; JC1.7@184.56,37.95 ccw(c185.646,37.95) 184.878,37.182 ; JC1.7@184.56,37.95 ccw(c185.646,37.95) 184.878,37.182 ; JC1.7@184.56,37.95 ccw(c185.646,37.95) 184.878,37.182
DET_5: JC1.6 U2.40 | length 78.5
  Top Layer w0.8: U2.40@155.113,20.4 155.113,18.512 156.3,17.325 158.55,17.325 159.85,16.025 159.85,6.75 162.25,4.35 175.15,4.35 178.175,7.375 178.175,33.285 JC1.6@181.57,36.68 ; U2.40@154.795,20.082 cw(c154.027,19.313) 155.113,19.313 ; U2.40@154.795,20.082 cw(c154.027,19.313) 155.113,19.313 ; U2.40@154.795,20.082 cw(c154.027,19.313) 155.113,19.313 ; 155.113,19.313 cw(c156.2,19.313) U2.40@155.431,20.082 ; 155.113,19.313 cw(c156.2,19.313) U2.40@155.431,20.082 ; 155.113,19.313 cw(c156.2,19.313) U2.40@155.431,20.082 ; 180.802,35.912 cw(c181.57,35.144) JC1.6@181.57,36.23 ; 180.802,35.912 ccw(c180.034,36.68) JC1.6@181.12,36.68 ; 180.802,35.912 cw(c181.57,35.144) JC1.6@181.57,36.23 ; 180.802,35.912 ccw(c180.034,36.68) JC1.6@181.12,36.68 ; 180.802,35.912 cw(c181.57,35.144) JC1.6@181.57,36.23 ; 180.802,35.912 ccw(c180.034,36.68) JC1.6@181.12,36.68
DET_6: JC1.5 U2.38 | length 53.1
  Bottom Layer w0.8: U2.38@150.033,20.4 150.033,21.183 151.975,23.125 166.375,23.125 169.85,26.6 184.475,26.6 186.3,28.425 186.3,33.22 JC1.5@184.11,35.41 ; JC1.5@184.11,34.96 cw(c184.11,33.874) 184.878,34.642 ; JC1.5@184.11,34.96 cw(c184.11,33.874) 184.878,34.642 ; JC1.5@184.11,34.96 cw(c184.11,33.874) 184.878,34.642 ; JC1.5@184.56,35.41 ccw(c185.646,35.41) 184.878,34.642 ; JC1.5@184.56,35.41 ccw(c185.646,35.41) 184.878,34.642 ; JC1.5@184.56,35.41 ccw(c185.646,35.41) 184.878,34.642
DI_485: U1.4 U2.36 | length 63.4
  Top Layer w0.8: U2.36@144.953,20.4 144.953,22.928 146.901,24.876 153.856,24.876 159.705,30.725 164.125,30.725 165.275,31.875 165.275,37.345 v1(161.483,41.137) ; U2.36@144.635,20.718 ccw(c143.867,21.486) 144.953,21.486 ; U2.36@144.635,20.718 ccw(c143.867,21.486) 144.953,21.486 ; U2.36@144.635,20.718 ccw(c143.867,21.486) 144.953,21.486 ; 144.953,21.486 ccw(c146.04,21.486) U2.36@145.271,20.718 ; 144.953,21.486 ccw(c146.04,21.486) U2.36@145.271,20.718 ; 144.953,21.486 ccw(c146.04,21.486) U2.36@145.271,20.718
  Bottom Layer w0.8: U1.4@147.544,39.958 149.198,38.304 156.79,38.304 156.794,38.3 157.477,38.3 160.314,41.137 v1(161.483,41.137) ; U1.4@147.544,39.508 cw(c147.544,38.421) 148.312,39.19 ; U1.4@147.544,39.508 cw(c147.544,38.421) 148.312,39.19 ; U1.4@147.544,39.508 cw(c147.544,38.421) 148.312,39.19 ; U1.4@147.994,39.958 ccw(c149.08,39.958) 148.312,39.19 ; U1.4@147.994,39.958 ccw(c149.08,39.958) 148.312,39.19 ; U1.4@147.994,39.958 ccw(c149.08,39.958) 148.312,39.19